# Altium PCB cs301_template.PcbDoc
Units mil, origin at the board's own origin, x right, y up, seen from the top; angles counter-clockwise.
Board outline 3460 x 5000 mil, 2 copper layers (Top Layer, Bottom Layer); 61 components, 46 nets, 326 pads, 0 vias.
Unrouted connection lines stored in the file: 103.
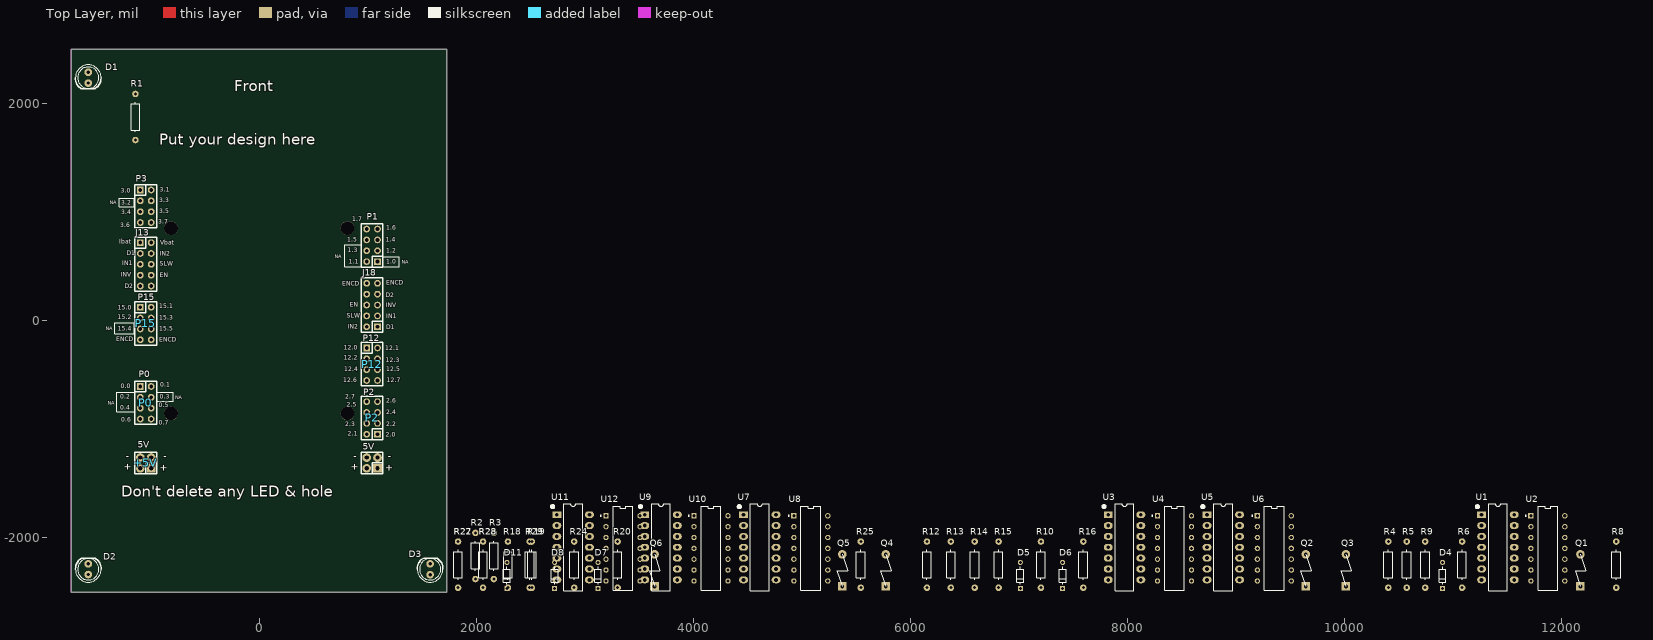
[diagram p0: Top Layer view]
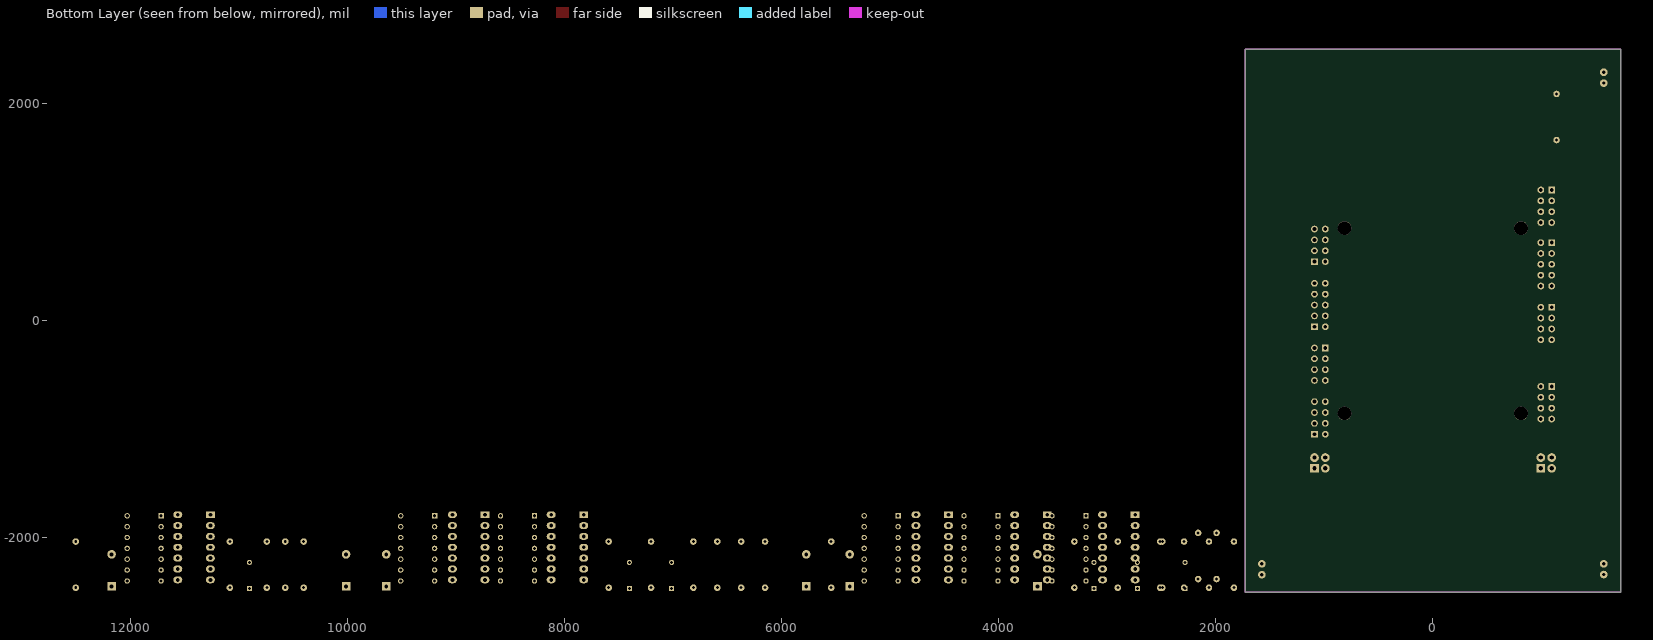
[diagram p1: Bottom Layer view, seen from below]

## Layer stack, top to bottom
Top Solder: solder mask 0.4, Solder Resist, Dk 3.5
Top Layer: signal copper 1.4
Dielectric1: dielectric 12.6, FR-4, Dk 4.8
Bottom Layer: signal copper 1.4
Bottom Solder: solder mask 0.4, Solder Resist, Dk 3.5

## Board outline
-1730,-2500 -1730,2500 1730,2500 1730,-2500

## Design rules (kind name [scope] priority, off if disabled: settings)
Clearance [All] p1: gap=10 ignorepadtopadclearanceinfootprint=FALSE except(0: Arc-Hole Track-Hole SMDPad-Hole THPad-Hole Via-Hole Fill-Hole Poly-Hole Region-Hole Text-Hole)
PolygonConnect [All] p1: connectstyle=Relief reliefconductorwidth=20 reliefentries=4 polygonreliefangle="90 Angle" airgapwidth=10
RoutingVias [All] p1: holewidth=28 width=50 viastyle="Through Hole" minholewidth=28 minwidth=50 maxholewidth=28 maxwidth=50
SilkToSolderMaskClearance SilkscreenOverComponentPads [IsPad] p1: minsilkscreentomaskgap=10 clearancetoexposedcopper=TRUE
SolderMaskExpansion [All] p1: expansion=4 istentingtop=FALSE
SupplyNets "Schematic Supply Nets" [InNet('GND')] p1: voltage=0.000
SupplyNets "Schematic Supply Nets_3" [InNet('V_ref1')] p2: voltage=0.000
SupplyNets "Schematic Supply Nets_1" [InNet('+5V')] p3: voltage=0.000
Width [All] p1: maxlimit=30 minlimit=10 preferedwidth=10 minimp=50.000000 maximp=50.000000 favimp=50.000000
29 further rules are at their usual default settings.

## Components (designator, comment, footprint, x,y, rotation, side; value= is the part's Value field where it differs from the comment)
5V "5V" IDC4 1090,-1360 r90 top locked
+5V "5V" IDC4 -995,-1360 r90 top locked
D1 "LED" LED0.1/5MM#1 -1574.8,2189.76 r180 top locked
D2 "LED" LED0.1/5MM#2 -1574.8,-2239.37 r0 top locked
D3 "LED" LED0.1/5MM#1 1574.8,-2239.37 r0 top locked
D4 "BAT85,113" FP-SOD68-MFG 10901.89,-2346.69 r90 top
D5 "BAT85,113" FP-SOD68-MFG 7011.89,-2346.69 r90 top
D6 "BAT85,113" FP-SOD68-MFG 7401.89,-2346.69 r90 top
D7 "BAT85,113" FP-SOD68-MFG 3121.89,-2346.69 r90 top
D8 "BAT85,113" FP-SOD68-MFG 2721.89,-2346.69 r90 top
D11 "BAT85,113" FP-SOD68-MFG 2281.89,-2346.69 r90 top
J13 "CON10" IDC10 -1095,720 r270 top locked
J18 "CON10" IDC10 1090,-55 r90 top locked
P0 "P0" idc8 -1095,-605 r270 top locked
P1 "P1" idc8 1090,545 r90 top locked
P2 "P2" idc8 1090,-1045 r90 top locked
P3 "P3" idc8 -1095,1205 r270 top locked
P12 "P12" idc8 990,-250 r270 top locked
P15 "P15" IDC8 -1095,125 r270 top locked
Q1 "TEMT6200" VEMT3700 12321.89,-2546.69 r90 top
Q2 "TEMT6200" VEMT3700 9791.89,-2546.69 r90 top
Q3 "TEMT6200" VEMT3700 10161.89,-2546.69 r90 top
Q4 "TEMT6200" VEMT3700 5921.89,-2546.69 r90 top
Q5 "TEMT6200" VEMT3700 5521.89,-2546.69 r90 top
Q6 "TEMT6200" VEMT3700 3791.89,-2546.69 r90 top
R1 "1k" AXIAL-0.4 -1140,1877.4 r90 top
R2 "1k" AXIAL-0.4 1991.89,-2166.69 r90 top
R3 "1k" AXIAL-0.4 2161.89,-2166.69 r90 top
R4 "47k" AXIAL-0.4 10401.89,-2246.69 r90 top
R5 "100k" AXIAL-0.4 10571.89,-2246.69 r90 top
R6 "100k" AXIAL-0.4 11081.89,-2246.69 r90 top
R8 "270k" AXIAL-0.4 12501.89,-2246.69 r90 top
R9 "30k" AXIAL-0.4 10741.89,-2246.69 r90 top
R10 "100k" AXIAL-0.4 7201.89,-2246.69 r90 top
R12 "47k" AXIAL-0.4 6151.89,-2246.69 r90 top
R13 "100k" AXIAL-0.4 6371.89,-2246.69 r90 top
R14 "47k" AXIAL-0.4 6591.89,-2246.69 r90 top
R15 "100k" AXIAL-0.4 6811.89,-2246.69 r90 top
R16 "100k" AXIAL-0.4 7591.89,-2246.69 r90 top
R18 "47k" AXIAL-0.4 2291.89,-2246.69 r90 top
R19 "100k" AXIAL-0.4 2511.89,-2246.69 r90 top
R20 "100k" AXIAL-0.4 3301.89,-2246.69 r90 top
R22 "47k" AXIAL-0.4 1831.89,-2246.69 r90 top
R23 "100k" AXIAL-0.4 2061.89,-2246.69 r90 top
R24 "100k" AXIAL-0.4 2901.89,-2246.69 r90 top
R25 "1k" AXIAL-0.4 5541.89,-2246.69 r90 top
R27 "47k" AXIAL-0.4 1831.89,-2246.69 r90 top
R28 "100k" AXIAL-0.4 2061.89,-2246.69 r90 top
R29 "100k" AXIAL-0.4 2491.89,-2246.69 r90 top
U1 "LM324" DIP-14 11411.89,-2086.69 r0 top
U2 "LM339N" FP-N0014A-MFG 11871.89,-2096.69 r0 top
U3 "LM324" DIP-14 7971.89,-2086.69 r0 top
U4 "LM339N" FP-N0014A-MFG 8431.89,-2096.69 r0 top
U5 "LM324" DIP-14 8881.89,-2086.69 r0 top
U6 "LM339N" FP-N0014A-MFG 9351.89,-2096.69 r0 top
U7 "LM324" DIP-14 4611.89,-2086.69 r0 top
U8 "LM339N" FP-N0014A-MFG 5081.89,-2096.69 r0 top
U9 "LM324" DIP-14 3701.89,-2086.69 r0 top
U10 "LM339N" FP-N0014A-MFG 4161.89,-2096.69 r0 top
U11 "LM324" DIP-14 2891.89,-2086.69 r0 top
U12 "LM339N" FP-N0014A-MFG 3351.89,-2096.69 r0 top

## Footprints (in the part's own frame and the unit in brackets; to place one, negate y for a bottom-side part, rotate by r counter-clockwise, add the part's x,y. Pads: shape width x height; smd on the part's side, far side on the other; paste and mask are expansions set on the pad)
AXIAL-0.4 [mil]
  round 60 hole 27.56: 1(-212.6,0) 2(212.6,0)
  silkscreen extent -138,-40 138,40, body extent -224,-51 224,51, height 106
DIP-14 [mm] "DIP; 14 Leads; Row Spacing 7.62 mm; Pitch 2.54 mm"
  rect 2.1x1.6 hole 0.9: 1(-3.81,7.62)
  oval 2.1x1.6 hole 0.9: 2(-3.81,5.08) 3(-3.81,2.54) 4(-3.81,0) 5(-3.81,-2.54) 6(-3.81,-5.08) 7(-3.81,-7.62) 8(3.81,-7.62) 9(3.81,-5.08) 10(3.81,-2.54) 11(3.81,0) 12(3.81,2.54) 13(3.81,5.08) 14(3.81,7.62)
  silkscreen extent -5.1,-10.2 2.2,10.2, body extent -5.07,-10.2 5.09,10.12, height 9.47
FP-N0014A-MFG [mm]
  rect 1.25x1.25 hole 0.75 paste-2539.97 mask+0: 1(-3.97,7.62)
  round 1.25 hole 0.75 paste-2539.97 mask+0: 2(-3.97,5.08) 3(-3.97,2.54) 4(-3.97,0) 5(-3.97,-2.54) 6(-3.97,-5.08) 7(-3.97,-7.62) 8(3.97,-7.62) 9(3.97,-5.08) 10(3.97,-2.54) 11(3.97,0) 12(3.97,2.54) 13(3.97,5.08) 14(3.97,7.62)
  silkscreen extent -5.32,-9.84 2.3,9.84, body extent -4.69,-9.94 4.69,9.94, height 0.25
FP-SOD68-MFG [mm]
  rect 1.2x1.2 hole 0.7 paste-2539.97 mask+0: 1(-3.07,0)
  round 1.2 hole 0.7 paste-2539.97 mask+0: 2(3.07,0)
  silkscreen extent -2.07,-0.8 2.07,0.8, body extent -3.77,-0.9 3.77,0.9, height 0.25
IDC4 [mil]
  rect 80x80 hole 40: 1(0,0)
  round 80 hole 40: 2(0,100) 3(100,0) 4(100,100)
  silkscreen extent -50,-50 150,150
idc8 [mil]
  rect 62x62 hole 35: 1(0,0)
  round 62 hole 35: 2(0,100) 3(100,0) 4(100,100) 5(200,0) 6(200,100) 7(300,0) 8(300,100)
  silkscreen extent -50,-50 350,150
IDC8 [mil]
  rect 62x62 hole 35: 1(0,0)
  round 62 hole 35: 2(0,100) 3(100,0) 4(100,100) 5(200,0) 6(200,100) 7(300,0) 8(300,100)
  silkscreen extent -50,-50 350,150
IDC10 [mil]
  rect 62x62 hole 35: 1(0,0)
  round 62 hole 35: 2(0,100) 3(100,0) 4(100,100) 5(200,0) 6(200,100) 7(300,0) 8(300,100) 9(400,0) 10(400,100)
  silkscreen extent -50,-50 450,150
LED0.1/5MM#1 [mil]
  round 70 hole 30: A(0,0) K(0,-100)
  silkscreen extent -118,-168 118,50
LED0.1/5MM#2 [mil]
  round 70 hole 30: A(0,0) K(0,-98.43)
  silkscreen extent -118,-168 118,50
VEMT3700 [mm]
  rect 2x2 hole 0.9: 1(2.54,3.81)
  round 2 hole 0.9: 2(10.033,3.81)
  silkscreen extent 2.54,2.54 10.03,5.08

## Part data
5V +5V: library part CON4, "Connector"
D4 D5 D6 D7 D8 D11: library part CMP-14398-000042-1, "DIODE SCHOTTKY 30V 200MA DO34", RoHS Compliant=Yes
J13 J18: "Connector"
P0 P1 P2 P3: library part CON8, "Connector"
P12 P15: library part CON8_1, "Connector"
Q1 Q2 Q3 Q4 Q5 Q6: library part VEMT3700, "Silicon NPN Phototransistor"
R1 R2 R3 R4 R5 R6 R8 R9 R10 R12 R13 R14 R15 R16 R18 R19 R20 R22 R23 R24 R25 R27 R28 R29: library part Res_TH_0AX4, "Through hole resistor", ComponentLink1Description=http://www.royalohm.com/pdf/product2017/PrecisionMetalMF.pdf, LatestRevisionDate=17-Jul-2002, LatestRevisionNote="Re-released for DXP Platform.", PackageReference=AXIAL-0.4, Published=8-Jun-2000, Publisher="Altium Limited"
U1 U3 U5 U7 U9 U11: library part LM324N_TH_DIP16, "IC OPAMP GP 14DIP", Current - Supply=1mA, Manufacturer="ON Semiconductor", Manufacturer Part Number=LM324N, Operating Temperature="0°C ~ 70°C", Package / Case="14-DIP (0.300\", 7.62mm)", Supplier Device Package=14-DIP, Supplier Part Number 1=LM324NFS-ND, Voltage - Supply, Single/Dual (±)="3 V ~ 32 V, ±1.5 V ~ 16 V", Amplifier Type="General Purpose", Base Part Number=LM324, Category="Integrated Circuits (ICs)", ComponentLink1Description=https://www.fairchildsemi.com/datasheets/LM/LM2902.pdf, ComponentLink1URL=https://www.fairchildsemi.com/datasheets/LM/LM2902.pdf, Mounting Type="Through Hole", Output Type=-, Packaging=Tube, Part Status=Active, Pricing 1="1=0.9, 10=0.775, 100=0.5789, 500=0.45482, 1000=0.35145 (NZD)", RoHS="RoHS Compliant", Slew Rate=-, Stock 1=2900, Supplier 1=Digi-Key
U2 U4 U6 U8 U10 U12: library part CMP-0055-00143-4, "IC QUAD DIFF COMPARATOR 14-DIP", Case/Package=PDIP, Dual Supply Voltage=9V, Input Bias Current=250nA, Input Offset Voltage (Vos)=5mV, Max Dual Supply Voltage=15V, Max Operating Temperature=70°C, Max Power Dissipation=1.05W, Max Supply Current=500uA, Max Supply Voltage=30V, Min Dual Supply Voltage=1V, Min Operating Temperature=0°C, Min Supply Voltage=2V, Nominal Supply Current=2mA, Output Current=20mA, Output Current per Channel=6mA, Package Quantity=25, Power Dissipation=1.05kW, Quiescent Current=2.5mA, Voltage Gain=106.02dB, Contact Plating=Gold, Height=4.57mm, Lead Free="Lead Free", Length=19.3mm, Max Input Current=250nA, Mount="Through Hole", Number of Channels=4, Number of Elements=4, Number of Pins=14, Output Type=TTL, Packaging=Rail/Tube, Radiation Hardening=No, REACH SVHC="No SVHC", Response Time=1.3us, Weight=0.032734oz, Width=6.35mm

## Free pads (board coordinates)
  round 125.98 hole 125.98 unplated: 1(-813,-853) 1(-813,853) 1(813,-853) 1(813,853)

## Nets (pads, with @x,y where several pads share a name; then routed paths per layer and width w, separated by ;. In a path a pad name is that pad's centre, name@x,y a point inside that pad or via, vN(x,y) a via of type N, cw(c..) or ccw(c..) an arc to the next point about the centre after c; other vN are vias at no path point)
+5V: 5V.1 5V.2 +5V.1 +5V.2 Q1.1 Q2.1 Q3.1 Q4.1 Q5.1 Q6.1 R1.2 R2.2 R3.2 R8.1 R25.2 U1.4 U2.3 U3.4 U4.3 U5.4 U6.3 U7.4 U8.3 U9.4 U10.3 U11.4 U12.3
GND: 5V.3 5V.4 +5V.3 +5V.4 R4.1 R5.1 R9.2 R12.1 R13.1 R14.1 R15.1 R18.1 R19.1 R22.1 R23.1 R27.1 R28.1 U1.11 U2.12 U3.11 U4.12 U5.11 U6.12 U7.11 U8.12 U9.11 U10.12 U11.11 U12.12
NetC1_1: Q1.2 R4.2
NetC1_2: D4.2 R5.2
NetC2_2: R6.1 U2.7
NetC3_1: Q2.2 R12.2
NetC3_2: D5.2 R13.2
NetC4_2: R10.1 U4.7
NetC5_1: Q3.2 R14.2
NetC5_2: D6.2 R15.2
NetC6_2: R16.1 U6.7
NetC7_1: Q4.2 R18.2
NetC7_2: D7.2 R19.2
NetC8_2: R20.1 U8.7
NetC9_1: Q5.2 R22.2
NetC9_2: D8.2 R23.2
NetC10_2: R24.1 U10.7
NetC11_1: Q6.2 R27.2
NetC11_2: D11.2 R28.2
NetC12_2: R29.1 U12.7
NetD1_A: D1.A R1.1
NetD2_A: D2.A R2.1
NetD3_A: D3.A R3.1
NetD4_1: D4.1 U1.3
NetD5_1: D5.1 U3.3
NetD6_1: D6.1 U5.3
NetD7_1: D7.1 U7.3
NetD8_1: D8.1 U9.3
NetD9_A: R25.1
NetD10_A: 
NetD11_1: D11.1 U11.3
NetD12_A: 
NetR6_2: R6.2 U1.1
NetR8_2: R8.2 R9.1
NetR10_2: R10.2 U3.1
NetR16_2: R16.2 U5.1
NetR20_2: R20.2 U7.1
NetR24_2: R24.2 U9.1
NetR29_2: R29.2 U11.1
OUT1: P0.5 U2.1
OUT2: P2.6 U4.1
OUT3: P2.7 U6.1
OUT4: P3.3 U8.1
OUT5: P3.8 U10.1
OUT6: P15.1 U12.1
V_ref1: U1.2 U2.6 U3.2 U4.6 U5.2 U6.6 U7.2 U8.6 U9.2 U10.6 U11.2 U12.6
pads on no net: D1.K D2.K D3.K J13.1 J13.2 J13.3 J13.4 J13.5 J13.6 J13.7 J13.8 J13.9 J13.10 J18.1 J18.2 J18.3 J18.4 J18.5 J18.6 J18.7 J18.8 J18.9 J18.10 P0.1 P0.2 P0.3 P0.4 P0.6 P0.7 P0.8 P1.1 P1.2 P1.3 P1.4 P1.5 P1.6 P1.7 P1.8 P2.1 P2.2 P2.3 P2.4 P2.5 P2.8 P3.1 P3.2 P3.4 P3.5 P3.6 P3.7 P12.1 P12.2 P12.3 P12.4 P12.5 P12.6 P12.7 P12.8 P15.2 P15.3 P15.4 P15.5 P15.6 P15.7 P15.8 U1.5 U1.6 U1.7 U1.8 U1.9 U1.10 U1.12 U1.13 U1.14 U2.2 U2.4 U2.5 U2.8 U2.9 U2.10 U2.11 U2.13 U2.14 U3.5 U3.6 U3.7 U3.8 U3.9 U3.10 U3.12 U3.13 U3.14 U4.2 U4.4 U4.5 U4.8 U4.9 U4.10 U4.11 U4.13 U4.14 U5.5 U5.6 U5.7 U5.8 U5.9 U5.10 U5.12 U5.13 U5.14 U6.2 U6.4 U6.5 U6.8 U6.9 U6.10 U6.11 U6.13 U6.14 U7.5 U7.6 U7.7 U7.8 U7.9 U7.10 U7.12 U7.13 U7.14 U8.2 U8.4 U8.5 U8.8 U8.9 U8.10 U8.11 U8.13 U8.14 U9.5 U9.6 U9.7 U9.8 U9.9 U9.10 U9.12 U9.13 U9.14 U10.2 U10.4 U10.5 U10.8 U10.9 U10.10 U10.11 U10.13 U10.14 U11.5 U11.6 U11.7 U11.8 U11.9 U11.10 U11.12 U11.13 U11.14 U12.2 U12.4 U12.5 U12.8 U12.9 U12.10 U12.11 U12.13 U12.14

## Keep-outs
Keep-Out Layer:
  the board outline again, w10

## Silkscreen, mask and mechanical layers (free items; w line width, h text height)
Top Overlay:
  lines w10: -1330,-120 -1150,-120 -1150,-20 -1330,-20 -1330,-120 ; -1310,-840 -1145,-840 -1145,-660 -1310,-660 -1310,-840 ; -1290,1050 -1150,1050 -1150,1130 -1290,1130 -1290,1050 ; -940,-740 -790,-740 -790,-660 -940,-660 -940,-740 ; 790,500 940,500 940,700 790,700 790,500 ; 1140,500 1290,500 1290,590 1140,590 1140,500
  text "Front" at -228.11,2113.31 h100
  text "Put your design here" at -920,1620 h100
  text "3.1" at -915,1190 h40
  text "3.0" at -1275,1180 h40
  text "3.3" at -920,1090 h40
  text "NA" at -1375,1075 h35
  text "3.2" at -1270,1070 h40
  text "3.5" at -920,990 h40
  text "3.4" at -1270,980 h40
  text "1.7" at 855,915 h40
  text "3.7" at -930,895 h40
  text "3.6" at -1280,860 h40
  text "1.6" at 1170,840 h40
  text "1.5" at 810,730 h40
  text "1.4" at 1165,730 h40
  text "Ibat" at -1290,710 h40
  text "Vbat" at -910,700 h40
  text "1.3" at 815,630 h40
  text "1.2" at 1170,625 h40
  text "D1" at -1220,605 h40
  text "IN2" at -915,600 h40
  text "NA" at 695,575 h35
  text "1.1" at 825,525 h40
  text "1.0" at 1170,525 h40
  text "NA" at 1315,525 h35
  text "IN1" at -1260,510 h40
  text "SLW" at -915,505 h40
  text "INV" at -1275,405 h40
  text "EN" at -915,400 h40
  text "ENCD" at 1170,330 h40
  text "ENCD" at 765,325 h40
  text "D2" at -1240,300 h40
  text "D2" at 1165,215 h40
  text "EN" at 835,130 h40
  text "INV" at 1165,125 h40
  text "15.1" at -920,115 h40
  text "15.0" at -1305,100 h40
  text "SLW" at 805,30 h40
  text "IN1" at 1170,25 h40
  text "15.2" at -1305,15 h40
  text "15.3" at -920,10 h40
  text "IN2" at 815,-75 h40
  text "D1" at 1170,-80 h40
  text "NA" at -1415,-85 h35
  text "15.4" at -1305,-90 h40
  text "15.5" at -920,-90 h40
  text "ENCD" at -1315,-190 h40
  text "ENCD" at -920,-195 h40
  text "12.0" at 780,-265 h40
  text "12.1" at 1160,-270 h40
  text "12.2" at 780,-360 h40
  text "12.3" at 1165,-380 h40
  text "12.4" at 785,-465 h40
  text "12.5" at 1170,-465 h40
  text "12.6" at 775,-565 h40
  text "12.7" at 1175,-565 h40
  text "0.1" at -910,-610 h40
  text "0.0" at -1275,-620 h40
  text "0.2" at -1280,-720 h40
  text "0.3" at -915,-720 h40
  text "2.7" at 795,-720 h40
  text "NA" at -775,-725 h35
  text "2.6" at 1170,-755 h40
  text "NA" at -1395,-775 h35
  text "2.5" at 805,-790 h40
  text "0.5" at -925,-795 h40
  text "0.4" at -1280,-820 h40
  text "2.4" at 1170,-860 h40
  text "0.6" at -1270,-930 h40
  text "0.7" at -925,-960 h40
  text "2.3" at 795,-970 h40
  text "2.2" at 1170,-970 h40
  text "2.1" at 815,-1060 h40
  text "2.0" at 1165,-1070 h40
  text "-" at -1195,-1230 h60 r180
  text "-" at -850,-1230 h60 r180
  text "-" at 900,-1230 h60 r180
  text "-" at 1215,-1230 h60 r180
  text "+" at -1185,-1380 h60 r90
  text "+" at 910,-1380 h60 r90
  text "+" at -850,-1390 h60 r90
  text "+" at 1225,-1390 h60 r90
  text "Don't delete any LED & hole" at -1270,-1620 h100